# Altium PCB PCB_Luximetro.PcbDoc
Units mm, origin at the board's own origin, x right, y up, seen from the top; angles counter-clockwise.
Board outline 98.68 x 96.27 mm, 2 copper layers (Top Layer, Bottom Layer); 38 components, 32 nets, 145 pads, 0 vias.
Unrouted connection lines stored in the file: 5.
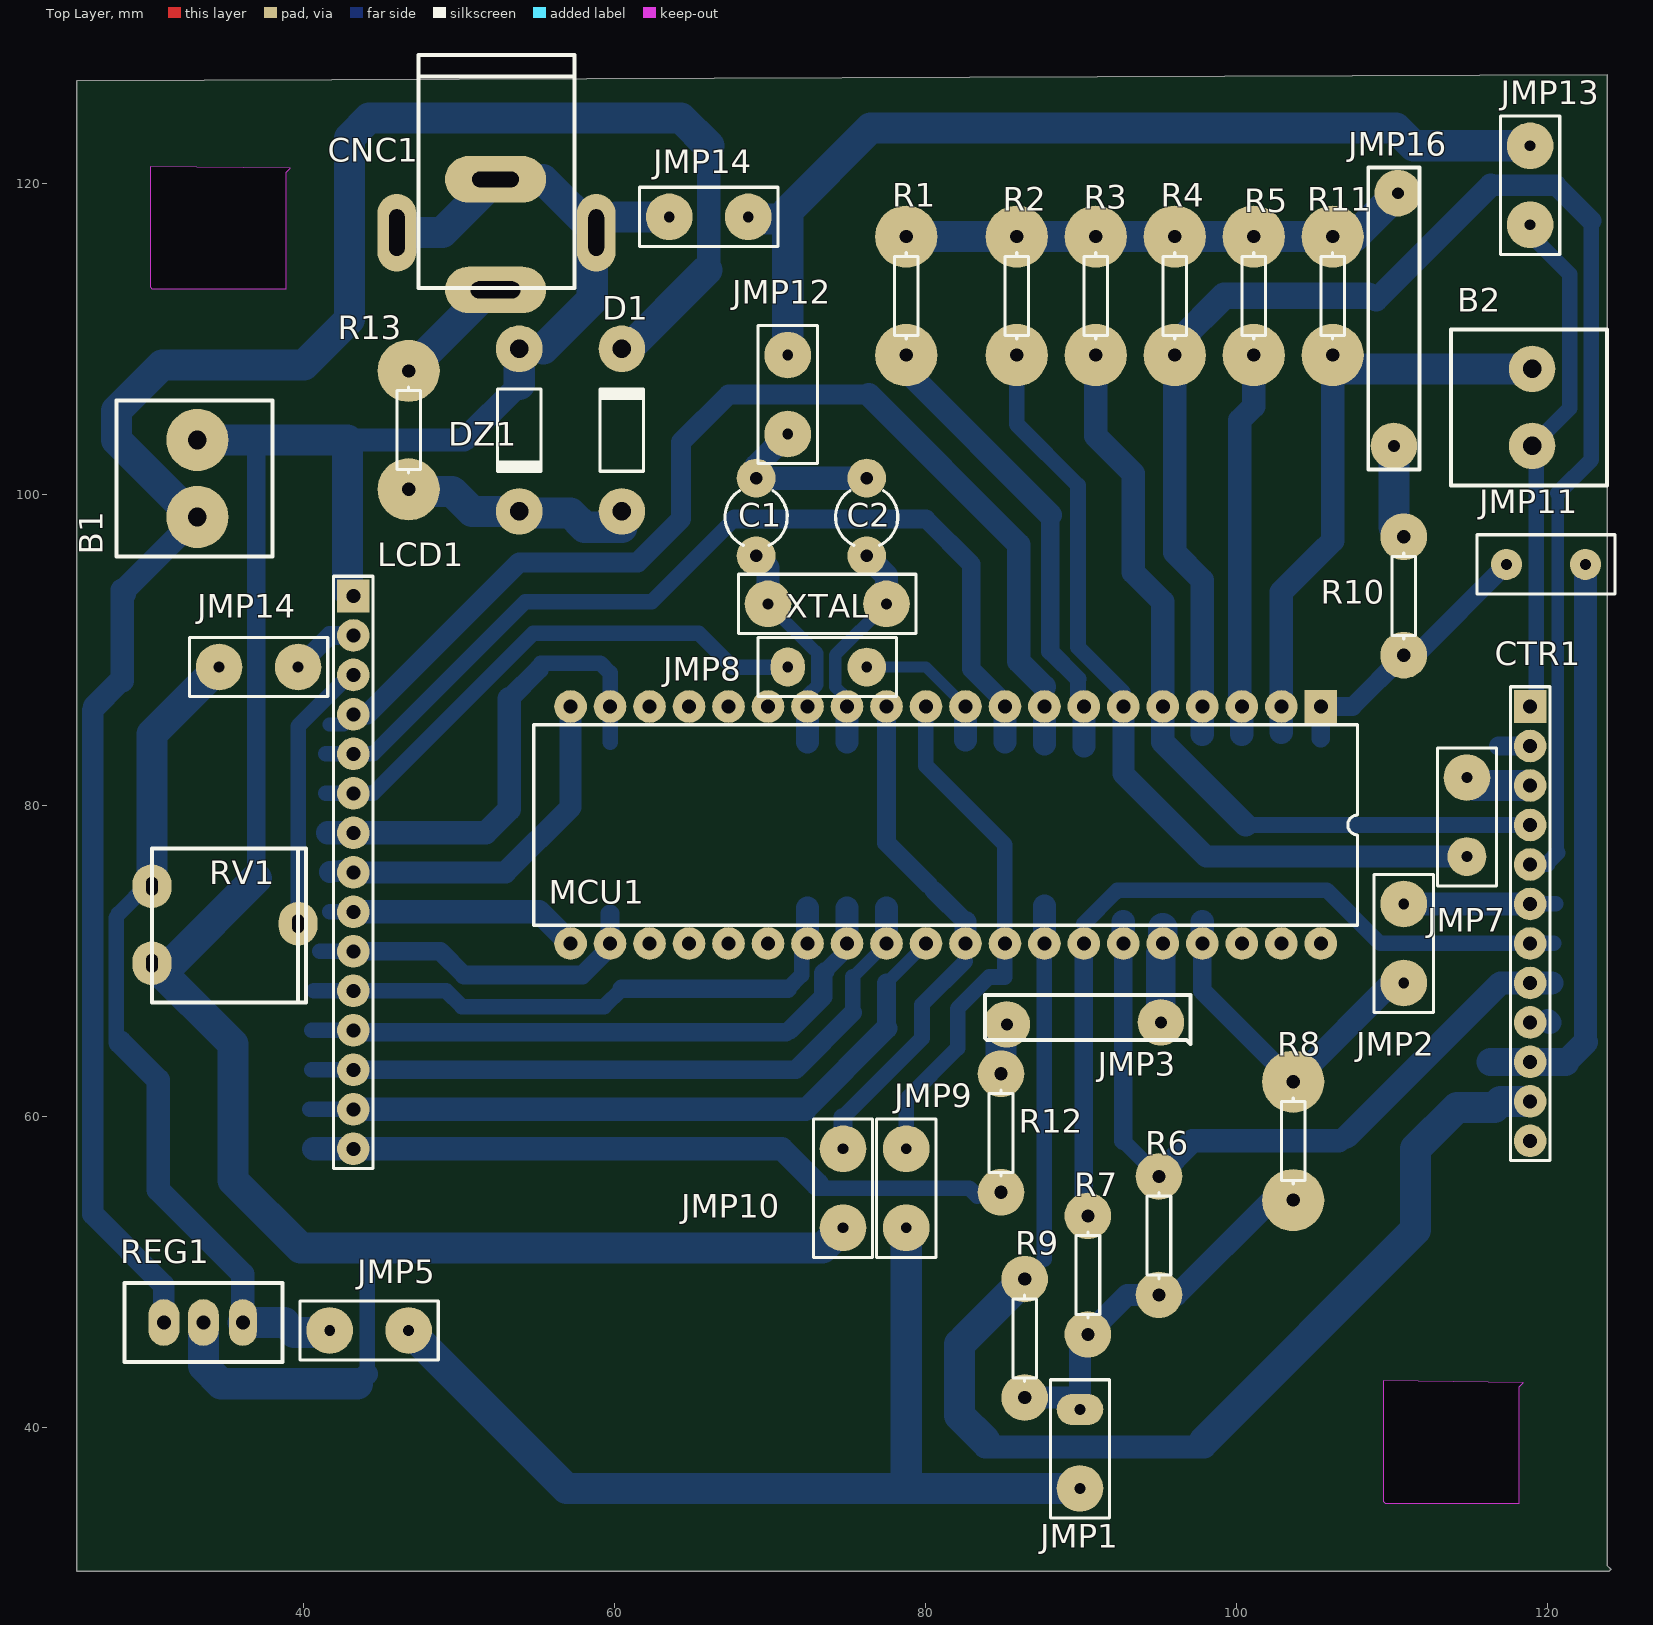
[diagram p0: Top Layer view]
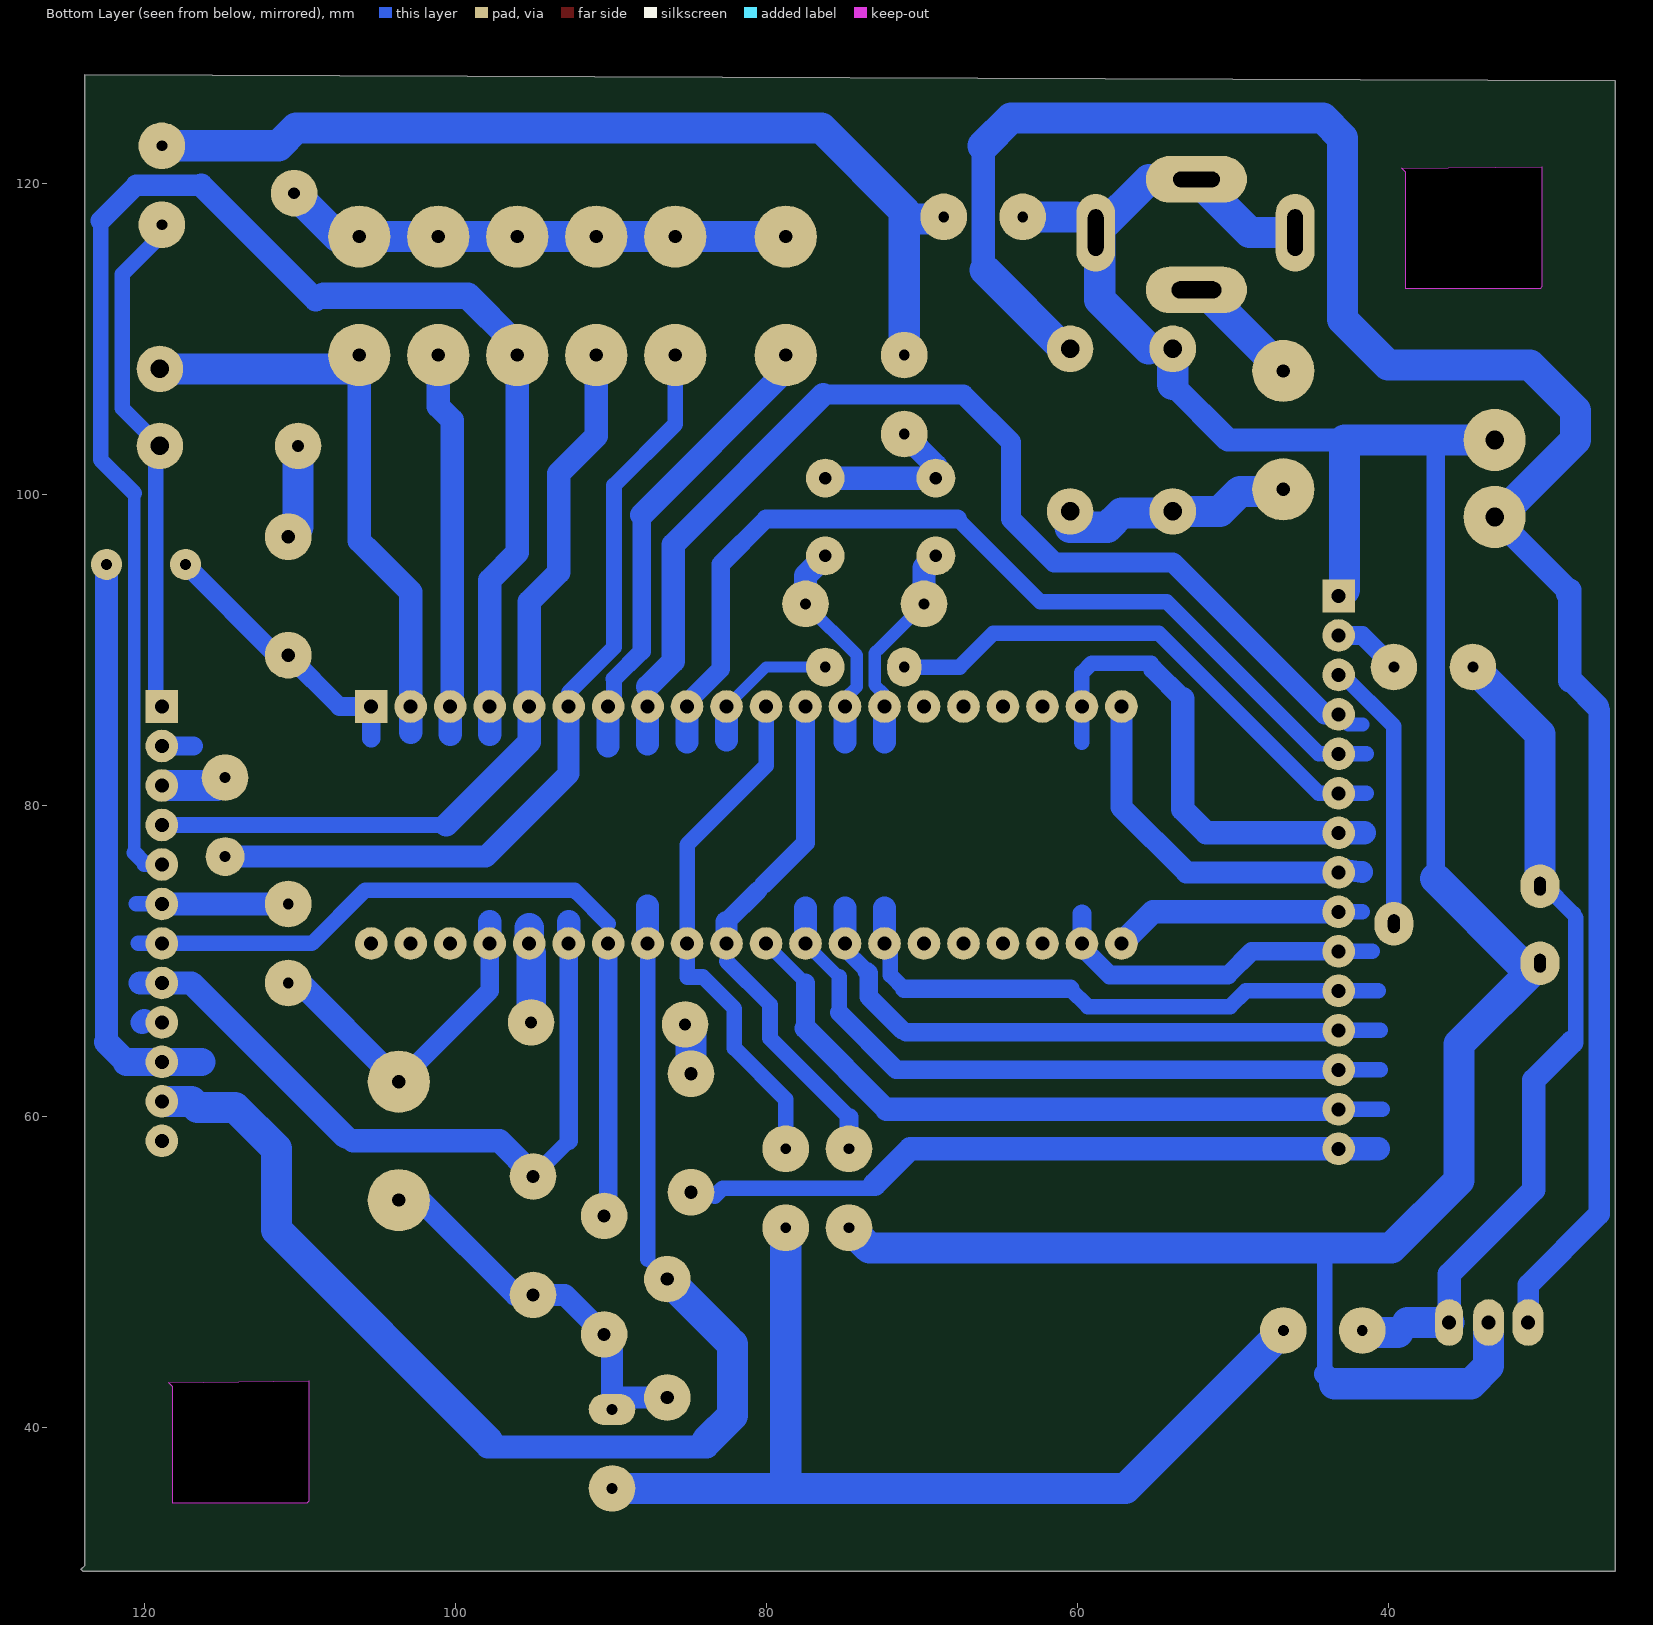
[diagram p1: Bottom Layer view, seen from below]

## Layer stack, top to bottom
Top Layer: signal copper 0.0356
Dielectric: dielectric 0.32, FR-4, Dk 4.8
Bottom Layer: signal copper 0.0356

## Board outline
25.4,126.619 25.4,30.734 123.952,30.734 124.079,30.861 123.825,31.115 123.825,127
cut-out: 109.41,42.989 109.41,35.242 109.537,35.115 118.173,35.115 118.173,42.608 118.427,42.862
cut-out: 30.099,121.094 30.099,113.347 30.226,113.221 38.862,113.221 38.862,120.713 39.116,120.968

## Design rules (kind name [scope] priority, off if disabled: settings)
Clearance [All] p1: gap=0.254
PolygonConnect [All] p1: connectstyle=Relief reliefconductorwidth=0.254 reliefentries=4 polygonreliefangle="90 Angle"
RoutingLayers [All] p1: top layer_v5=FALSE bottom layer_v5=TRUE
RoutingTopology [All] p1: topology=Daisy_Simple
RoutingVias [All] p1: holewidth=0.711 width=1.27 viastyle="Through Hole" minholewidth=0.711 minwidth=1.27 maxholewidth=0.711 maxwidth=1.27
SolderMaskExpansion [All] p1: expansion=0.102
TestPointUsage [All] p1: valid=0 allowmultiple=FALSE
Testpoint [All] p1: side=15 testpointundercomponent=TRUE minsize=1.016 maxsize=2.54 preferedsize=1.524 minholesize=0 maxholesize=1.016 preferedholesize=0.813 testpointgrid=0.025 style=1023 order=0123456789
Width [All] p1: maxlimit=3 minlimit=0.254 preferedwidth=0.6
17 further rules are at their usual default settings.

## Classes and differential pairs
component class Esquematico_Luximetro: B1 B2 C1 C2 CNC1 CTR1 D1 DZ1 LCD1 MCU1 R1 R2 R3 R4 R5 R6 R7 R8 R9 R10 R11 R12 R13 REG1 RV1 XTAL

## Components (designator, comment, footprint, x,y, rotation, side; value= is the part's Value field where it differs from the comment)
B1 "Bateria" PCB_BORNE#1 27.94,96.012 r90 top
B2 "SENSOR LDR" PCB_BORNE#2 113.792,100.584 r90 top
C1 "Cap2" CAPR5-4X5 69.088,98.552 r270 top
C2 "Cap2" CAPR5-4X5 76.2,98.552 r270 top
CNC1 "Conector_Macho" PCB_Conector 57.404,113.284 r180 top
CTR1 "Conector - Painel Botões" HDR1X12 118.872,86.36 r270 top
D1 "Diode 1N4007" DO-41 60.452,104.14 r90 top
DZ1 "Diode Zener" DO-41 53.848,104.14 r270 top
JMP1 "Comment" RAD-0.2#1 89.916,38.608 r90 top
JMP2 "Comment" RAD-0.2#2 110.744,71.12 r90 top
JMP5 "Comment" RAD-0.2#2 44.196,46.228 r0 top
JMP7 "Comment" RAD-0.2#3 114.808,79.248 r90 top
JMP8 "Comment" RAD-0.2#4 73.66,88.9 r0 top
JMP9 "Comment" RAD-0.2#2 78.74,55.372 r90 top
JMP10 "Comment" RAD-0.2#2 74.676,55.372 r90 top
JMP11 "Comment" RAD-0.2#5 119.888,95.504 r0 top
JMP12 "Comment" RAD-0.2#2 71.12,106.426 r90 top
JMP13 "Comment" RAD-0.2#2 118.872,119.888 r90 top
JMP14 "Comment" RAD-0.2#2 37.084,88.9 r180 top
JMP14 "Comment" RAD-0.2#2 66.04,117.856 r180 top
LCD1 "CONECTOR DISPLAY" HDR1X15 43.18,93.472 r270 top
MCU1 "PIC18C452-I/P" PDIP600-40 81.28,78.74 r180 top
R1 "Res2" AXIAL-0.3#1 78.74,112.776 r270 top
R2 "Res3" AXIAL-0.3#1 85.852,112.776 r270 top
R3 "Res4" AXIAL-0.3#1 90.932,112.776 r270 top
R4 "Res5" AXIAL-0.3#1 96.012,112.776 r270 top
R5 "Res1" AXIAL-0.3#1 101.092,112.776 r90 top
R6 "Res1" AXIAL-0.3#2 94.996,52.324 r270 top
R7 "Res1" AXIAL-0.3#2 90.424,49.784 r270 top
R8 "Res1" AXIAL-0.3#1 103.632,58.42 r270 top
R9 "Res1" AXIAL-0.3#2 86.36,45.72 r90 top
R10 "Res1" AXIAL-0.3#2 110.744,93.472 r270 top
R11 "Res5" AXIAL-0.3#1 106.172,112.776 r270 top
R12 "BACKLIGHT" AXIAL-0.3#2 84.836,58.928 r270 top
R13 "Res1" AXIAL-0.3#1 46.736,104.14 r270 top
REG1 "Regulador 5v" PCB_CI7805 28.448,49.276 r0 top
RV1 "Trimpot 10k" PCB_TRIMPOT 40.132,77.216 r270 top
XTAL "Cap" RAD-0.3 73.66,92.964 r180 top

## Footprints (in the part's own frame and the unit in brackets; to place one, negate y for a bottom-side part, rotate by r counter-clockwise, add the part's x,y. Pads: shape width x height; smd on the part's side, far side on the other; paste and mask are expansions set on the pad)
AXIAL-0.3#1 [mm] "Resistor; 2 Leads"
  round 4 hole 0.85: 1(-3.81,0) 2(3.81,0)
  silkscreen extent -2.77,-0.76 2.77,0.76
AXIAL-0.3#2 [mm] "Resistor; 2 Leads"
  round 3 hole 0.85: 1(-3.81,0) 2(3.81,0)
  silkscreen extent -2.77,-0.76 2.77,0.76
CAPR5-4X5 [mm] "Capacitor; 2 Leads"
  round 2.5 hole 0.8: 1(-2.5,0) 2(2.5,0)
  silkscreen extent -1.69,-2 1.82,2
DO-41 [mm] "Diode, Axial; Body 5.2 x 2.7 mm (LxDia. max), Lead Dia. 0.86 mm (max)"
  round 3 hole 1.2: 1(-5.23,0) 2(5.23,0)
  silkscreen extent -2.65,-1.4 2.75,1.4
HDR1X12 [mm] "Connector; Header; 12 Position"
  rect 2.1x2.1 hole 0.9: 1(0,0)
  round 2.1 hole 0.9: 2(2.54,0) 3(5.08,0) 4(7.62,0) 5(10.16,0) 6(12.7,0) 7(15.24,0) 8(17.78,0) 9(20.32,0) 10(22.86,0) 11(25.4,0) 12(27.94,0)
  silkscreen extent -1.27,-1.27 29.21,1.27
HDR1X15 [mm] "Connector; Header; 15 Position"
  rect 2.1x2.1 hole 0.9: 1(0,0)
  round 2.1 hole 0.9: 2(2.54,0) 3(5.08,0) 4(7.62,0) 5(10.16,0) 6(12.7,0) 7(15.24,0) 8(17.78,0) 9(20.32,0) 10(22.86,0) 11(25.4,0) 12(27.94,0) 13(30.48,0) 14(33.02,0) 15(35.56,0)
  silkscreen extent -1.27,-1.27 36.83,1.27
PCB_BORNE#1 [mm]
  round 4 hole 1.2: 1(2.54,-5.207) 2(7.493,-5.207)
  silkscreen extent 0,-10.03 10.03,0
PCB_BORNE#2 [mm]
  round 3 hole 1.2: 1(2.54,-5.207) 2(7.493,-5.207)
  silkscreen extent 0,-10.03 10.03,0
PCB_CI7805 [mm]
  oval 2x3 hole 0.9: 1(2.54,-2.54) 2(5.08,-2.54)
  oval 1.8x3 hole 0.9: 3(7.62,-2.54)
  silkscreen extent 0,-5.08 10.16,0
PCB_Conector [mm]
  oval 6.5x3 hole 1 slot 3 at 0 deg: 1(5.08,-6.985)
  oval 2.5x5 hole 1 slot 3 at 90 deg: 2(-1.397,-3.556)
  oval 6.5x3 hole 1.1 slot 3.2 at 0 deg: 3(5.08,0.127)
  silkscreen extent 0,-14.99 10.03,0
PCB_TRIMPOT [mil]
  oval 110.24x98.43 hole 30 slot 47.24 at 0 deg: 1(190,-20) 2(95,-390) 3(290,-390)
  silkscreen extent 0,-390 390,0
PDIP600-40 [mm] "DIP, Plastic; 40 Leads; Row Spacing 15.24 mm; Pitch 2.54 mm"
  rect 2.1x2.1 hole 0.9: 1(-24.13,-7.62)
  round 2.1 hole 0.9: 2(-21.59,-7.62) 3(-19.05,-7.62) 4(-16.51,-7.62) 5(-13.97,-7.62) 6(-11.43,-7.62) 7(-8.89,-7.62) 8(-6.35,-7.62) 9(-3.81,-7.62) 10(-1.27,-7.62) 11(1.27,-7.62) 12(3.81,-7.62) 13(6.35,-7.62) 14(8.89,-7.62) 15(11.43,-7.62) 16(13.97,-7.62) 17(16.51,-7.62) 18(19.05,-7.62) 19(21.59,-7.62) 20(24.13,-7.62) 21(24.13,7.62) 22(21.59,7.62) 23(19.05,7.62) 24(16.51,7.62) 25(13.97,7.62) 26(11.43,7.62) 27(8.89,7.62) 28(6.35,7.62) 29(3.81,7.62) 30(1.27,7.62) 31(-1.27,7.62) 32(-3.81,7.62) 33(-6.35,7.62) 34(-8.89,7.62) 35(-11.43,7.62) 36(-13.97,7.62) 37(-16.51,7.62) 38(-19.05,7.62) 39(-21.59,7.62) 40(-24.13,7.62)
  silkscreen extent -26.5,-6.45 26.5,6.45
RAD-0.2#1 [mm] "Jumper Wire; 2 Leads"
  round 3 hole 0.7: 1(-2.54,0)
  oval 2x3 hole 0.7: 1(2.54,0)
  silkscreen extent -4.44,-1.91 4.44,1.91
RAD-0.2#2 [mm] "Jumper Wire; 2 Leads"
  round 3 hole 0.7: 1(-2.54,0) 2(2.54,0)
  silkscreen extent -4.44,-1.91 4.44,1.91
RAD-0.2#3 [mm] "Jumper Wire; 2 Leads"
  round 2.5 hole 0.7: 1(-2.54,0)
  round 3 hole 0.7: 2(2.54,0)
  silkscreen extent -4.44,-1.91 4.44,1.91
RAD-0.2#4 [mm] "Jumper Wire; 2 Leads"
  oval 2.2x2.5 hole 0.7: 1(-2.54,0)
  round 2.5 hole 0.7: 2(2.54,0)
  silkscreen extent -4.44,-1.91 4.44,1.91
RAD-0.2#5 [mm] "Jumper Wire; 2 Leads"
  round 2 hole 0.7: 1(-2.54,0) 2(2.54,0)
  silkscreen extent -4.44,-1.91 4.44,1.91
RAD-0.3 [mm] "Capacitor; 2 Leads"
  round 3 hole 0.7: 1(-3.81,0) 2(3.81,0)
  silkscreen extent -5.71,-1.91 5.71,1.91

## Part data
B1 B2: library part Borne
C1 C2 XTAL: "Capacitor"
CNC1: library part Conector
CTR1: library part "Header 12", "Header, 12-Pin"
D1: "1 Amp General Purpose Rectifier"
DZ1: library part "Diode 1N4007", "1 Amp General Purpose Rectifier"
LCD1: library part "Header 15", "Header, 15-Pin"
MCU1: "High Performance Microcontroller with 10-Bit A/D, 32K EPROM, 40-Pin PDIP, Standard Volt Range, Industrial Temperature"
R1 R2 R3 R4 R11 R12: library part Res1, "Resistor"
R5 R6 R7 R8 R9 R10 R13: "Resistor"
REG1: library part Regulador
RV1: library part Trimpot

## Free pads (board coordinates)
  round 3 hole 0.762: 0(95.123,66.04) 1(85.217,65.913) 2(110.363,119.38) 3(110.109,103.124)
  oval 2.5x5 hole 1 slot 3 at 90 deg: 1(45.974,116.84)

## Nets (pads, with @x,y where several pads share a name; then routed paths per layer and width w, separated by ;. In a path a pad name is that pad's centre, name@x,y a point inside that pad or via, vN(x,y) a via of type N, cw(c..) or ccw(c..) an arc to the next point about the centre after c; other vN are vias at no path point)
GND: B1.2 B2.1 C1.1 C2.1 CNC1.1 CNC1.2 CTR1.1 DZ1.1 JMP10.1 JMP10.2 JMP12.1 JMP12.2 JMP13.1 JMP13.2 JMP14.1@68.58,117.856 JMP14.2@63.5,117.856 LCD1.1 MCU1.12 MCU1.31 pad.1@45.974,116.84 REG1.2 RV1.3 | length 326.5
  Bottom Layer w0.254: REG1.2 REG1.2@33.528,46.863 ; 39.77,51.543 39.872,51.543 39.892,51.523 ; 43.942,51.523 44.069,51.396 ; CNC1.1@49.403,120.269 CNC1.1 CNC1.1@55.372,120.269 ; DZ1.1@53.744,109.37 DZ1.1 ; CNC1.2 58.801,116.586 58.928,116.713 60.071,117.856 ; C1.1 C1.1@69.088,101.854 ; JMP12.1 71.12,104.013 JMP12.1@71.247,104.14
  Bottom Layer w0.5: 82.55,69.977 MCU1.31
  Bottom Layer w0.7: RV1.3 31.496,69.85 ; DZ1.1 55.395,109.37 ; CNC1.2@58.547,116.586 CNC1.2 ; JMP14.1@68.58,117.856 JMP14.1@68.707,117.729 ; JMP13.1@118.872,116.713 JMP13.1
  Bottom Layer w1: 36.935,103.483 36.957,103.505 ; LCD1.1@42.799,93.853 LCD1.1 ; 44.069,43.434 44.069,51.396 ; 74.676,59.944 79.756,65.024 79.756,67.183 82.55,69.977 ; MCU1.12 MCU1.12@77.724,86.106 ; JMP13.1@118.872,116.713 121.412,114.173 121.412,105.537 119.253,103.378 119.253,103.124 119.253,86.741 CTR1.1@118.999,86.487
  Bottom Layer w1.2: 36.935,75.289 36.935,103.483 ; JMP10.2 74.676,59.944 ; MCU1.12 77.47,77.597 80.137,74.93 ; 80.518,74.549 82.55,72.517
  Bottom Layer w1.4: 43.434,42.799 44.069,43.434 ; MCU1.31 82.55,72.517
  Bottom Layer w1.5: 42.799,103.505 50.292,103.505 53.848,107.061 ; C1.1 C2.1 ; C1.1@69.088,101.854 JMP12.1
  Bottom Layer w2: RV1.3 35.433,64.643 35.433,55.88 39.77,51.543 ; 31.496,69.85 36.935,75.289 ; B1.2 36.957,103.505 42.799,103.505 LCD1.1@42.799,93.853 ; REG1.2 33.528,43.942 34.671,42.799 43.434,42.799 ; 39.892,51.523 43.942,51.523 73.367,51.523 JMP10.1 ; pad.1@45.974,116.84 48.895,116.84 CNC1.1 ; 53.848,107.061 DZ1.1 ; CNC1.1@55.372,120.269 CNC1.2 ; 55.395,109.37 58.547,112.522 CNC1.2@58.547,116.586 ; 60.071,117.856 JMP14.2@63.5,117.856 ; JMP14.1@68.707,117.729 71.12,117.729 ; JMP12.2 71.12,117.729 ; JMP13.2 111.379,122.428 110.236,123.571 76.454,123.571 71.12,118.237 71.12,117.729
NetB1_1: B1.1 D1.2 REG1.1 | length 134.8
  Bottom Layer w0.7: D1.2@60.579,109.093 D1.2@60.654,109.168 ; D1.2@60.96,108.354 D1.2@61.214,108.608
  Bottom Layer w1.4: 26.416,86.106 26.416,53.721 30.988,49.149 REG1.1
  Bottom Layer w1.5: 26.543,86.36 28.067,87.884 ; 28.321,88.011 28.321,93.726 ; 28.321,93.853 28.321,93.726 ; 28.448,93.599 28.321,93.726 ; B1.1 28.321,93.726 ; 66.04,114.3 66.04,122.428
  Bottom Layer w2: B1.1@32.893,98.552 27.94,103.505 27.94,105.41 30.861,108.331 40.005,108.331 42.926,111.252 42.926,122.936 44.196,124.206 64.262,124.206 ; D1.2@60.654,109.168 65.913,114.427 ; 64.135,124.206 64.262,124.206 ; 66.04,122.428 64.262,124.206
NetB2_2: B2.2 MCU1.2 R11.2 | length 39.1
  Bottom Layer w0.254: 105.156,96.012 105.346,96.203
  Bottom Layer w0.7: R11.2 R11.2@107.061,108.077
  Bottom Layer w1.5: 102.87,84.709 MCU1.2 102.87,93.726 105.346,96.203 106.172,97.028 R11.2
  Bottom Layer w2: R11.2@107.061,108.077 B2.2
NetC1_2: C1.2 MCU1.14 XTAL.2 | length 15
  Bottom Layer w0.254: MCU1.14@72.39,85.852 MCU1.14 ; MCU1.14@72.39,87.122 MCU1.14 ; MCU1.14@72.644,86.614 MCU1.14 ; 72.644,90.17 72.898,90.17
  Bottom Layer w0.7: C1.2 C1.2@69.85,95.29
  Bottom Layer w0.8: XTAL.2 72.644,90.17 73.025,89.789 73.025,87.757 MCU1.14@72.39,87.122
  Bottom Layer w1.5: XTAL.2 C1.2@69.85,95.29 ; 72.39,84.074 MCU1.14
NetC2_2: C2.2 MCU1.13 XTAL.1 | length 15.2
  Bottom Layer w0.254: 74.803,83.947 74.93,84.074 ; MCU1.13@74.93,85.852 MCU1.13 MCU1.13@74.93,86.868 ; XTAL.1 77.597,92.964 XTAL.1@77.724,92.837
  Bottom Layer w0.8: MCU1.13@74.93,86.868 74.168,87.63 74.168,89.662 XTAL.1
  Bottom Layer w1.5: 74.93,84.074 MCU1.13 ; C2.2 77.47,94.782 XTAL.1
NetCNC1_3: CNC1.3 R13.1 | length 7.9
  Bottom Layer w0.254: R13.1@46.609,107.823 R13.1 ; CNC1.3@51.943,113.157 CNC1.3
  Bottom Layer w2: R13.1 CNC1.3@51.943,113.157
NetCTR1_2: CTR1.2 MCU1.7 R1.2 | length 32.2
  Bottom Layer w0.7: R1.2@78.486,108.966 R1.2 R1.2@78.74,107.95 ; MCU1.7@89.789,86.741 MCU1.7
  Bottom Layer w1: MCU1.7@89.789,86.741 89.789,88.138
  Bottom Layer w1.1: 88.011,89.916 89.789,88.138
  Bottom Layer w1.2: 88.011,89.916 88.011,98.679 ; 116.84,83.82 CTR1.2
  Bottom Layer w1.5: R1.2@78.74,107.95 88.011,98.679 ; 90.17,83.82 MCU1.7
NetCTR1_3: CTR1.3 JMP7.1 JMP7.2 MCU1.6 R2.2 | length 58.3
  Bottom Layer w0.7: MCU1.6 MCU1.6@92.71,87.249 ; JMP7.2 JMP7.2@115.316,81.28
  Bottom Layer w1: R2.2 85.852,104.521 89.789,100.584 89.789,90.17 MCU1.6@92.71,87.249
  Bottom Layer w1.4: MCU1.6 92.71,82.042 98.044,76.708 JMP7.1
  Bottom Layer w2: JMP7.2@115.316,81.28 CTR1.3
NetCTR1_4: CTR1.4 MCU1.5 R3.2 | length 52.5
  Bottom Layer w1: 100.584,78.74 CTR1.4
  Bottom Layer w1.5: R3.2 90.932,103.759 93.345,101.346 93.345,94.996 95.25,93.091 MCU1.5 95.25,84.074 100.584,78.74
NetCTR1_5: CTR1.5 MCU1.4 R4.2 | length 102.7
  Bottom Layer w0.254: MCU1.4@97.79,85.852 MCU1.4 ; 120.015,76.2 120.015,76.327
  Bottom Layer w0.8: 120.65,76.962 120.65,100.076
  Bottom Layer w1: 107.95,112.522 108.966,112.522 ; CTR1.5 120.015,76.2 ; 120.015,76.327 120.65,76.962 ; 120.65,100.076 122.809,102.235 122.809,117.602
  Bottom Layer w1.3: 120.523,119.888 122.809,117.602
  Bottom Layer w1.4: 116.332,119.888 120.523,119.888
  Bottom Layer w1.5: R4.2@96.266,109.855 96.012,109.855 R4.2 96.012,96.266 97.79,94.488 MCU1.4 97.79,84.582 ; 108.966,112.522 116.332,119.888
  Bottom Layer w1.7: R4.2@96.266,109.855 99.187,112.776 108.458,112.776
NetCTR1_6: CTR1.6 JMP2.1 JMP2.2 MCU1.37 R8.1 | length 32.3
  Bottom Layer w0.254: JMP2.1@110.744,69.342 JMP2.1@110.744,69.596
  Bottom Layer w0.7: JMP2.1@110.363,68.961 JMP2.1@110.744,69.342
  Bottom Layer w1: CTR1.6 120.523,73.66
  Bottom Layer w1.2: MCU1.37@97.79,70.612 97.79,68.072 R8.1
  Bottom Layer w1.5: MCU1.37 97.79,72.517 ; R8.1 JMP2.1@110.363,68.961 ; JMP2.2 CTR1.6
NetCTR1_7: CTR1.7 MCU1.34 R7.1 | length 50.9
  Bottom Layer w0.7: MCU1.34 90.17,72.39
  Bottom Layer w1: 90.17,72.39 92.202,74.422 ; 92.329,74.549 105.791,74.549 109.22,71.12 CTR1.7 120.396,71.12
  Bottom Layer w1.2: R7.1@90.17,53.848 MCU1.34
NetCTR1_8: CTR1.8 MCU1.35 R6.1 | length 47.3
  Bottom Layer w0.7: R6.1 R6.1@94.996,56.261 ; 106.553,58.42 106.807,58.674 107.061,58.674
  Bottom Layer w1: 92.71,58.42 R6.1
  Bottom Layer w1.2: 92.71,58.42 MCU1.35@92.71,70.612
  Bottom Layer w1.5: MCU1.35 92.71,72.517 ; R6.1@94.996,56.261 97.155,58.42 106.553,58.42 ; 107.061,58.674 116.967,68.58 CTR1.8 120.269,68.58
NetCTR1_9: CTR1.9 MCU1.3 R5.1 | length 26.3
  Bottom Layer w0.254: CTR1.9 120.142,66.04 120.396,66.04
  Bottom Layer w1.5: MCU1.3@100.203,86.487 100.203,104.775 101.092,105.664 R5.1 ; 100.33,84.582 MCU1.3 ; 120.015,66.167 120.142,66.04
NetCTR1_10: CTR1.10 JMP11.1 JMP11.2 MCU1.1 R10.2 | length 55.1
  Bottom Layer w0.7: R10.2 R10.2@111.506,89.662
  Bottom Layer w1.2: 105.41,84.328 MCU1.1 107.442,86.36 R10.2 ; R10.2@111.506,89.662 JMP11.1
  Bottom Layer w1.5: 122.428,64.77 JMP11.2
  Bottom Layer w1.6: 121.158,63.5 122.428,64.77
  Bottom Layer w1.8: 116.332,63.5 CTR1.10 121.158,63.5
NetCTR1_11: CTR1.11 MCU1.33 R9.2 | length 83.6
  Bottom Layer w0.7: R9.2 87.63,50.8
  Bottom Layer w1: 87.63,50.8 MCU1.33@87.63,70.612
  Bottom Layer w1.5: 83.82,38.735 97.917,38.735 ; MCU1.33 87.63,73.533
  Bottom Layer w2: 82.169,45.339 82.169,40.767 83.82,39.116 ; 82.423,45.593 R9.2 ; 97.917,39.116 111.506,52.705 111.506,57.912 114.173,60.579 116.586,60.579 116.967,60.96 CTR1.11
NetD1_1: D1.1 DZ1.2 R13.2 | length 15.2
  Bottom Layer w0.254: DZ1.2 DZ1.2@53.952,98.806
  Bottom Layer w0.7: R13.2 R13.2@46.863,100.203 ; D1.1@60.452,97.894 D1.1@60.96,97.894
  Bottom Layer w2: R13.2@46.863,100.203 49.53,100.203 50.823,98.91 DZ1.2 ; DZ1.2@53.952,98.806 57.15,98.806 58.062,97.894 D1.1@60.452,97.894
NetLCD1_3: LCD1.3 RV1.1 | length 17.6
  Bottom Layer w0.5: LCD1.3@42.926,88.392 LCD1.3
  Bottom Layer w1: RV1.1 39.624,85.09 LCD1.3@42.926,88.392
NetLCD1_4: LCD1.4 MCU1.8 | length 73.5
  Bottom Layer w0.9: 41.656,85.217 42.545,85.217 LCD1.4
  Bottom Layer w1: LCD1.4 LCD1.4@44.069,85.852 ; MCU1.8 87.63,87.63
  Bottom Layer w1.3: LCD1.4@44.069,85.852 53.848,95.631 61.468,95.631 64.262,98.425 64.262,103.378 67.31,106.426 76.327,106.426
  Bottom Layer w1.5: 76.327,106.426 85.979,96.774 85.979,89.281 87.63,87.63 ; 87.63,83.947 MCU1.8
NetLCD1_5: LCD1.5 MCU1.9 | length 62.4
  Bottom Layer w0.254: MCU1.9@84.709,86.487 84.836,86.36 MCU1.9@84.836,86.868
  Bottom Layer w0.6: LCD1.5 44.45,83.312
  Bottom Layer w1: 41.402,83.312 LCD1.5 LCD1.5@44.196,83.312 ; 44.45,83.312 54.229,93.091 62.357,93.091 67.691,98.425
  Bottom Layer w1.2: 67.691,98.425 80.01,98.425 82.931,95.504 82.931,88.773 MCU1.9@84.836,86.868
  Bottom Layer w1.5: 85.09,84.074 MCU1.9
NetLCD1_6: JMP8.1 JMP8.2 LCD1.6 MCU1.10 | length 44.4
  Bottom Layer w0.7: JMP8.2 80.01,88.9 MCU1.10
  Bottom Layer w1: 41.402,80.772 LCD1.6 44.45,80.772 54.737,91.059 65.405,91.059 67.564,88.9 JMP8.1
  Bottom Layer w1.5: 82.55,84.201 MCU1.10
NetLCD1_7: LCD1.7 MCU1.19 | length 31.5
  Bottom Layer w1: 55.245,89.154 58.801,89.154 ; 59.69,84.074 MCU1.19 59.69,88.519 59.055,89.154 ; 58.801,89.154 59.055,89.154 ; 58.801,89.154 59.055,89.154
  Bottom Layer w1.3: 53.213,86.868 55.118,88.773
  Bottom Layer w1.5: 41.529,78.232 LCD1.7 51.689,78.232 53.213,79.756 53.213,86.868
NetLCD1_8: LCD1.8 MCU1.20 | length 24.2
  Bottom Layer w0.254: MCU1.20 MCU1.20@57.15,86.614
  Bottom Layer w1.4: 41.653,75.71 42.778,75.872 LCD1.8@43.18,75.872 ; LCD1.8 52.959,75.692 57.15,79.883 MCU1.20 MCU1.20@57.15,86.614
NetLCD1_9: LCD1.9 MCU1.21 | length 16.3
  Bottom Layer w1: 41.656,73.152 LCD1.9
  Bottom Layer w1.5: LCD1.9 55.118,73.152 MCU1.21
NetLCD1_10: LCD1.10 MCU1.22 | length 22.2
  Bottom Layer w1: 41.021,70.612 LCD1.10
  Bottom Layer w1.2: LCD1.10 48.768,70.612 50.292,69.088 57.912,69.088 59.69,70.866 MCU1.22 59.69,73.025
NetLCD1_11: LCD1.11 MCU1.27 | length 37.4
  Bottom Layer w0.254: MCU1.27 72.39,71.247 MCU1.27
  Bottom Layer w0.7: MCU1.27@72.009,70.739 MCU1.27
  Bottom Layer w1: 40.64,68.072 LCD1.11 49.149,68.072 50.165,67.056 59.309,67.056 60.452,68.199 ; 71.12,68.199 72.009,69.088 MCU1.27@72.009,70.739
  Bottom Layer w1.2: 60.452,68.199 71.12,68.199
  Bottom Layer w1.5: MCU1.27 72.39,73.406
NetLCD1_12: LCD1.12 MCU1.28 | length 40.2
  Bottom Layer w0.254: MCU1.28@75.12,70.929 MCU1.28@75.184,70.993
  Bottom Layer w1: 40.513,65.532 LCD1.12 ; 73.533,69.342 MCU1.28@75.12,70.929
  Bottom Layer w1.2: LCD1.12@42.799,65.405 43.18,65.405 70.993,65.405 ; 71.247,65.532 73.406,67.691 73.406,69.215 73.533,69.342
  Bottom Layer w1.5: MCU1.28 74.93,73.406
NetLCD1_13: LCD1.13 MCU1.29 | length 43.7
  Bottom Layer w0.254: MCU1.29@77.216,70.866 MCU1.29@77.216,70.993
  Bottom Layer w0.8: 75.311,68.961 MCU1.29@77.216,70.866
  Bottom Layer w1: 40.513,62.992 LCD1.13 ; 75.311,66.675 75.311,68.961
  Bottom Layer w1.2: LCD1.13 71.628,62.992 75.311,66.675
  Bottom Layer w1.5: MCU1.29 77.47,73.406
NetLCD1_14: LCD1.14 MCU1.30 | length 45.8
  Bottom Layer w0.8: 77.47,68.58 MCU1.30
  Bottom Layer w1: 40.386,60.452 LCD1.14
  Bottom Layer w1.2: 77.47,65.659 77.47,68.58
  Bottom Layer w1.4: 72.263,60.452 77.47,65.659
  Bottom Layer w1.5: LCD1.14 72.263,60.452
NetLCD1_15: LCD1.15 R12.2 | length 45.4
  Bottom Layer w0.7: 83.312,55.118 R12.2
  Bottom Layer w1: 73.025,55.372 82.804,55.372 83.312,54.864
  Bottom Layer w1.5: 40.64,57.912 LCD1.15 70.739,57.912 73.025,55.626
NetMCU1_36: MCU1.36 pad.0 pad.1@85.217,65.913 R12.1 | length 9
  Bottom Layer w0.254: pad.1@84.836,65.659 pad.1@85.09,65.913 ; pad.1@85.217,65.659 pad.1@85.217,65.913
  Bottom Layer w1.9: pad.0 MCU1.36@95.123,70.485 ; MCU1.36 MCU1.36@95.25,72.136
  Bottom Layer w2: R12.1 pad.1@84.836,65.659
VCC: JMP1.1 JMP5.1 JMP5.2 JMP9.1 JMP9.2 JMP14.1@39.624,88.9 JMP14.2@34.544,88.9 LCD1.2 MCU1.11 MCU1.32 pad.2 pad.3 R1.1 R2.1 R3.1 R4.1 R5.2 R6.2 R7.2 R8.2 R9.1 R10.1 R11.1 REG1.3 RV1.2 | length 220.8
  Bottom Layer w0.254: R1.1@78.613,115.443 R1.1@78.74,115.57
  Bottom Layer w0.7: 38.735,46.736 39.37,46.101 ; JMP1.1@89.154,41.91 JMP1.1@89.916,41.148 ; R7.2@89.916,45.466 R7.2 ; R6.2 R6.2@96.139,48.514 ; R8.2@102.235,54.61 R8.2 ; R10.1@110.109,97.917 R10.1
  Bottom Layer w1: 27.94,64.77 27.94,72.771 ; 28.067,73.025 30.035,74.993 RV1.2@30.099,75.057 ; JMP9.2 78.74,61.087 82.042,64.389 82.042,66.929 84.074,68.961 85.09,68.961 MCU1.32 85.09,77.47 80.01,82.55 MCU1.11
  Bottom Layer w1.2: JMP14.1@39.624,88.9 41.656,90.932 LCD1.2
  Bottom Layer w1.4: R1.1@78.74,115.57 79.248,116.078 R1.1@79.756,116.586 ; R9.1 JMP1.1@89.154,41.91 ; JMP1.1@89.916,41.148 R7.2@89.916,45.466 ; R7.2 92.964,48.514 R6.2 ; R6.2@96.139,48.514 R8.2@102.235,54.61 ; R11.1 R11.1@107.569,116.586
  Bottom Layer w1.5: 28.194,64.77 30.633,62.331 30.633,55.271 36.068,49.836 REG1.3
  Bottom Layer w2: RV1.2 30.226,84.582 JMP14.2@34.544,88.9 ; REG1.3 38.735,46.736 ; 39.37,46.101 JMP5.1@41.529,46.101 ; JMP5.2 56.896,36.068 78.74,36.068 ; JMP9.1@78.74,52.324 78.74,36.068 ; R1.1@79.756,116.586 R2.1 R3.1 R4.1 R5.2 R11.1 ; JMP1.1@89.916,36.068 78.74,36.068 ; R11.1@107.569,116.586 pad.2 ; R10.1@110.109,97.917 pad.3
pads on no net: CTR1.12 MCU1.15 MCU1.16 MCU1.17 MCU1.18 MCU1.23 MCU1.24 MCU1.25 MCU1.26 MCU1.38 MCU1.39 MCU1.40

## Silkscreen, mask and mechanical layers (free items; w line width, h text height)
Top Overlay:
  lines w0.254: 83.82,65.024 83.947,64.897 96.774,64.897 97.028,64.643 97.028,67.818 84.709,67.818 83.82,67.818 83.82,65.024 ; 108.458,101.6 108.458,121.031 111.76,121.031 111.76,101.6 108.458,101.6
  text "JMP16" at 107.188,121.793 h1.52
  text "JMP3" at 91.059,62.611 h1.52